# Altium PCB PS Digital Test v1.0.PcbDoc (part 2 of 3)
Units mil, origin at the board's own origin, x right, y up, seen from the top; angles counter-clockwise.
Board outline 3937.01 x 3937.01 mil, 4 copper layers (Top Layer, Signal Layer 1, Signal Layer 2, Bottom Layer), stack 55.634 mil thick; 120 components, 122 nets, 566 pads, 362 vias.
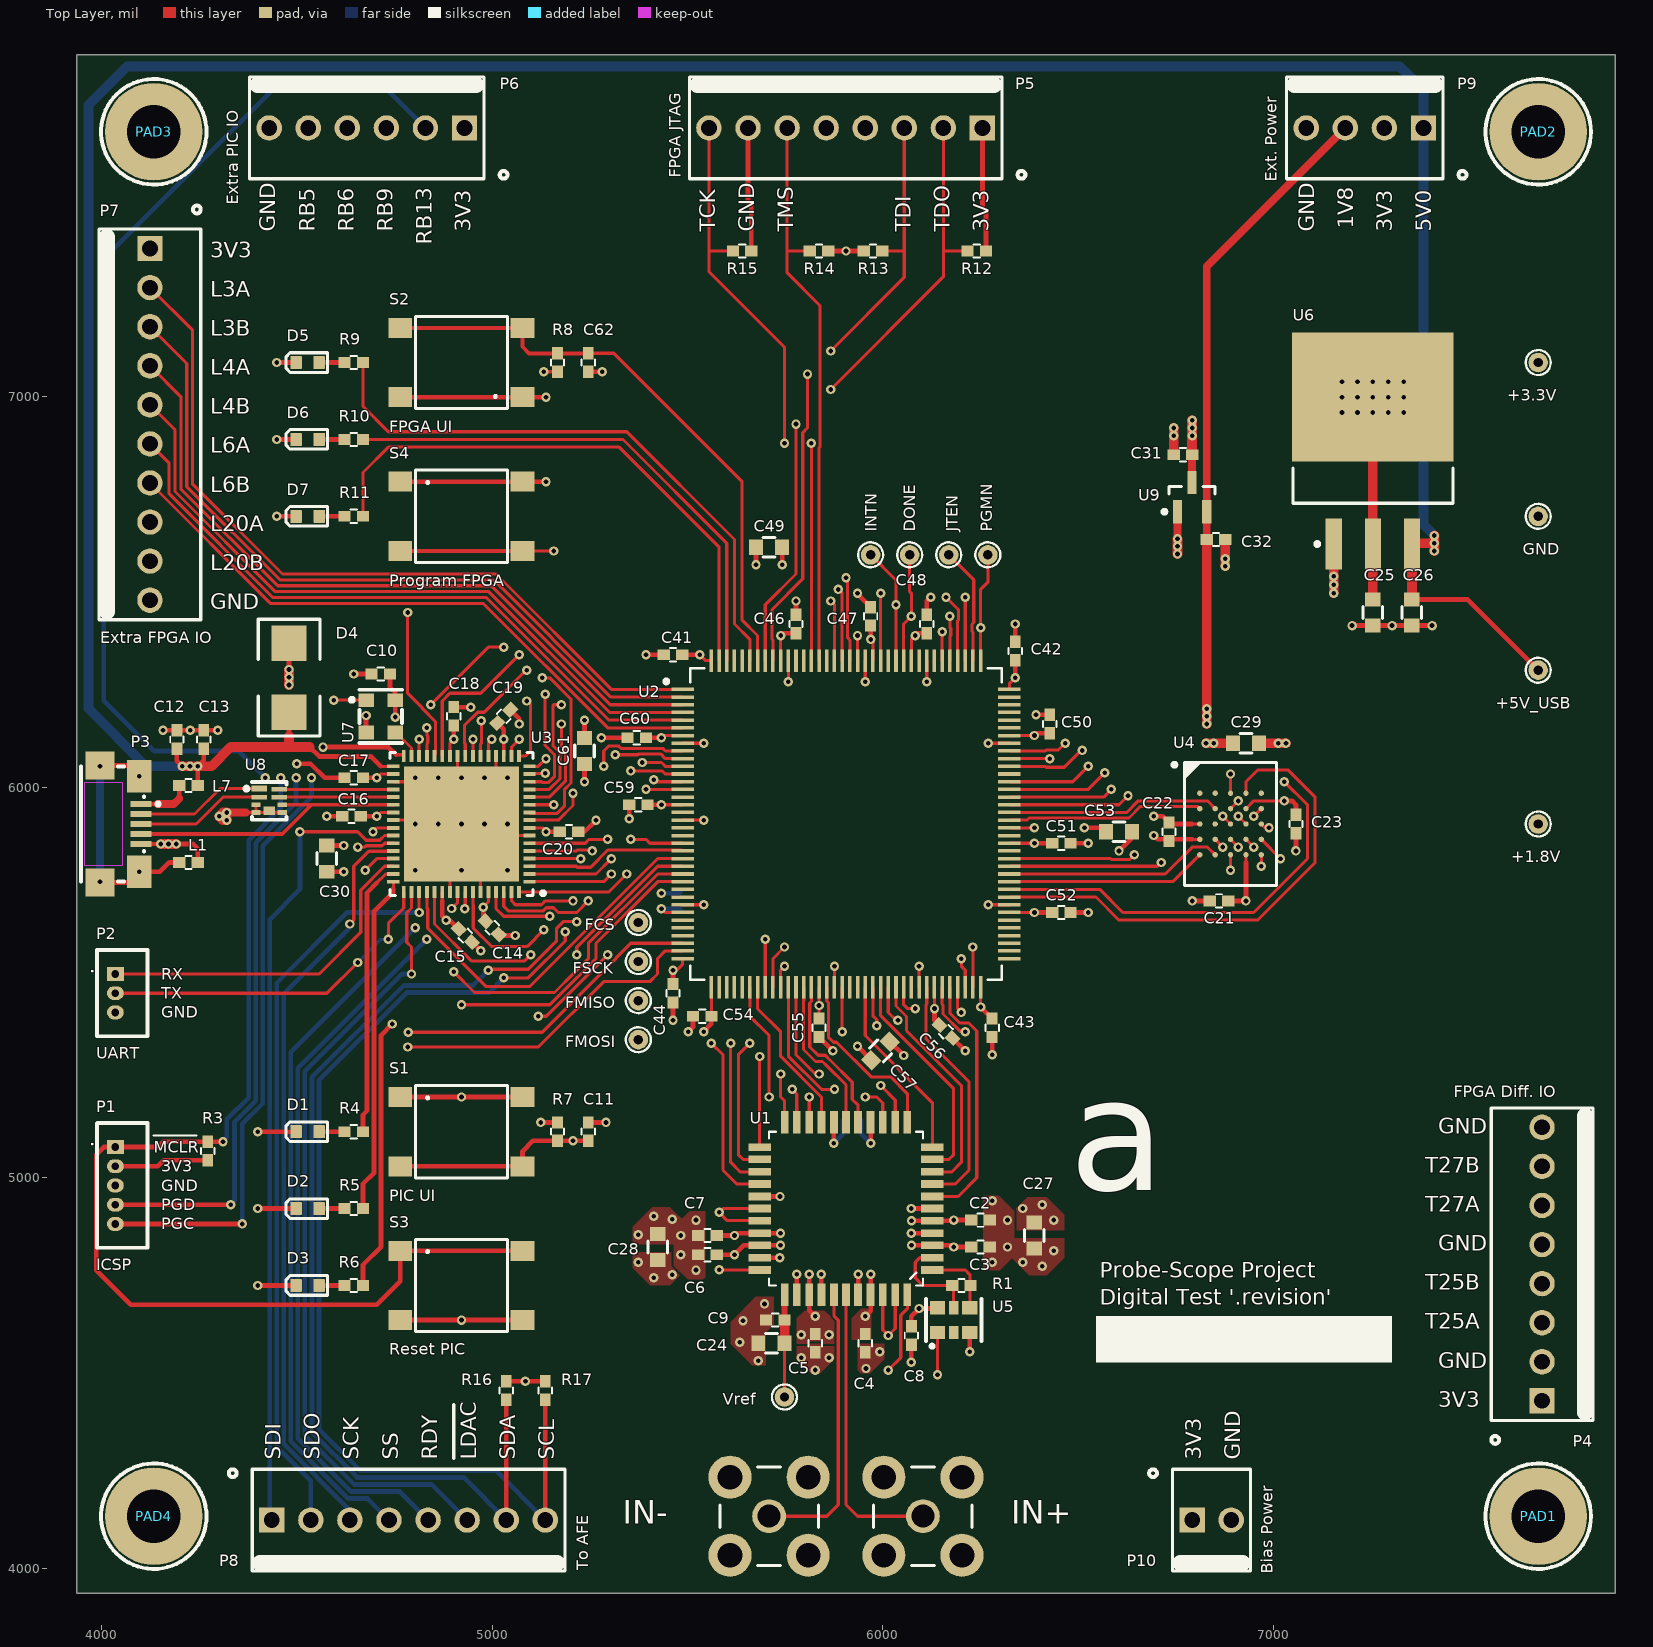
[diagram p0: Top Layer view]

## Via types
v1: diameter 24, hole 12, Top Layer to Bottom Layer, 350 vias
v2: diameter 24, hole 12, Top Layer to Bottom Layer, tented top, 12 vias

## Nets (pads, with @x,y where several pads share a name; then routed paths per layer and width w, separated by ;. In a path a pad name is that pad's centre, name@x,y a point inside that pad or via, vN(x,y) a via of type N, cw(c..) or ccw(c..) an arc to the next point about the centre after c; other vN are vias at no path point) (continued)
FDIO1_N: (continued)
  Top Layer w8: U2.111@6210.63,6323.51 v1(6210.63,6486.22)
  Signal Layer 2 w8: v1(6210.63,6486.22) 6220.47,6476.38 6220.47,5807.09 6998.43,5029.13 P4.7@7687.01,5029.13
FDIO1_P: P4.6 U2.112 | length 2724.8
  Top Layer w8: v1(6161.42,6486.22) 6193.26,6454.38 6193.26,6427.9 6190.94,6425.58 U2.112@6190.94,6323.51
  Signal Layer 2 w8: v1(6161.42,6486.22) 6178.79,6468.85 6180.37,6468.85 6193.26,6455.96 6193.26,6454.38 6204.47,6443.17 6204.47,5800.46 6991.8,5013.13 7603.01,5013.13 P4.6@7687.01,4929.13
FJ_TCK: P5.8 R15.2 U2.131 | length 1573.9
  Top Layer w8: 5554.72,7372.05 R15.2@5616.14,7372.05 ; P5.8@5554.72,7687.01 5554.72,7319.29 5748.03,7125.98 v1(5748.03,6879.92) ; U2.131@5816.93,6323.51 v1(5816.93,6879.92)
  Signal Layer 2 w8: v1(5748.03,6879.92) v1(5816.93,6879.92)
FJ_TDI: P5.3 R13.1 U2.136 | length 1561.4
  Top Layer w8: U2.136@5718.5,6323.51 5718.5,6376.37 5716.19,6378.68 5716.19,6454.26 5794.93,6533 5794.93,6907.13 5807.09,6919.29 v1(5807.09,7057.09) ; v1(5866.14,7116.14) 6054.72,7304.72 P5.3@6054.72,7687.01 ; R13.1@5998.03,7372.05 6054.72,7372.05
  Signal Layer 2 w8: v1(5807.09,7057.09) v1(5866.14,7116.14)
FJ_TDO: P5.2 R12.1 U2.137 | length 1614.1
  Top Layer w8: U2.137@5698.82,6323.51 5698.82,6466.54 5777.56,6545.28 v1(5777.56,6929.13) ; v1(5866.14,7017.72) 6154.72,7306.3 P5.2@6154.72,7687.01 ; 6154.72,7372.05 R12.1@6216.54,7372.05
  Signal Layer 2 w8: v1(5777.56,6929.13) v1(5866.14,7017.72)
FJ_TMS: P5.6 R14.1 U2.130 | length 1457.6
  Top Layer w8: 5754.72,7372.05 R14.1@5812.99,7372.05 ; P5.6@5754.72,7687.01 5754.72,7316.14 5838.93,7231.94 5838.93,6870.81 5836.61,6868.49 U2.130@5836.61,6323.51